# Altium PCB P8_ref.PcbDoc
Units mm, origin at the board's own origin, x right, y up, seen from the top; angles counter-clockwise.
Board outline 39 x 39 mm, 2 copper layers (Top Layer, Bottom Layer); 87 components, 54 nets, 243 pads, 135 vias.
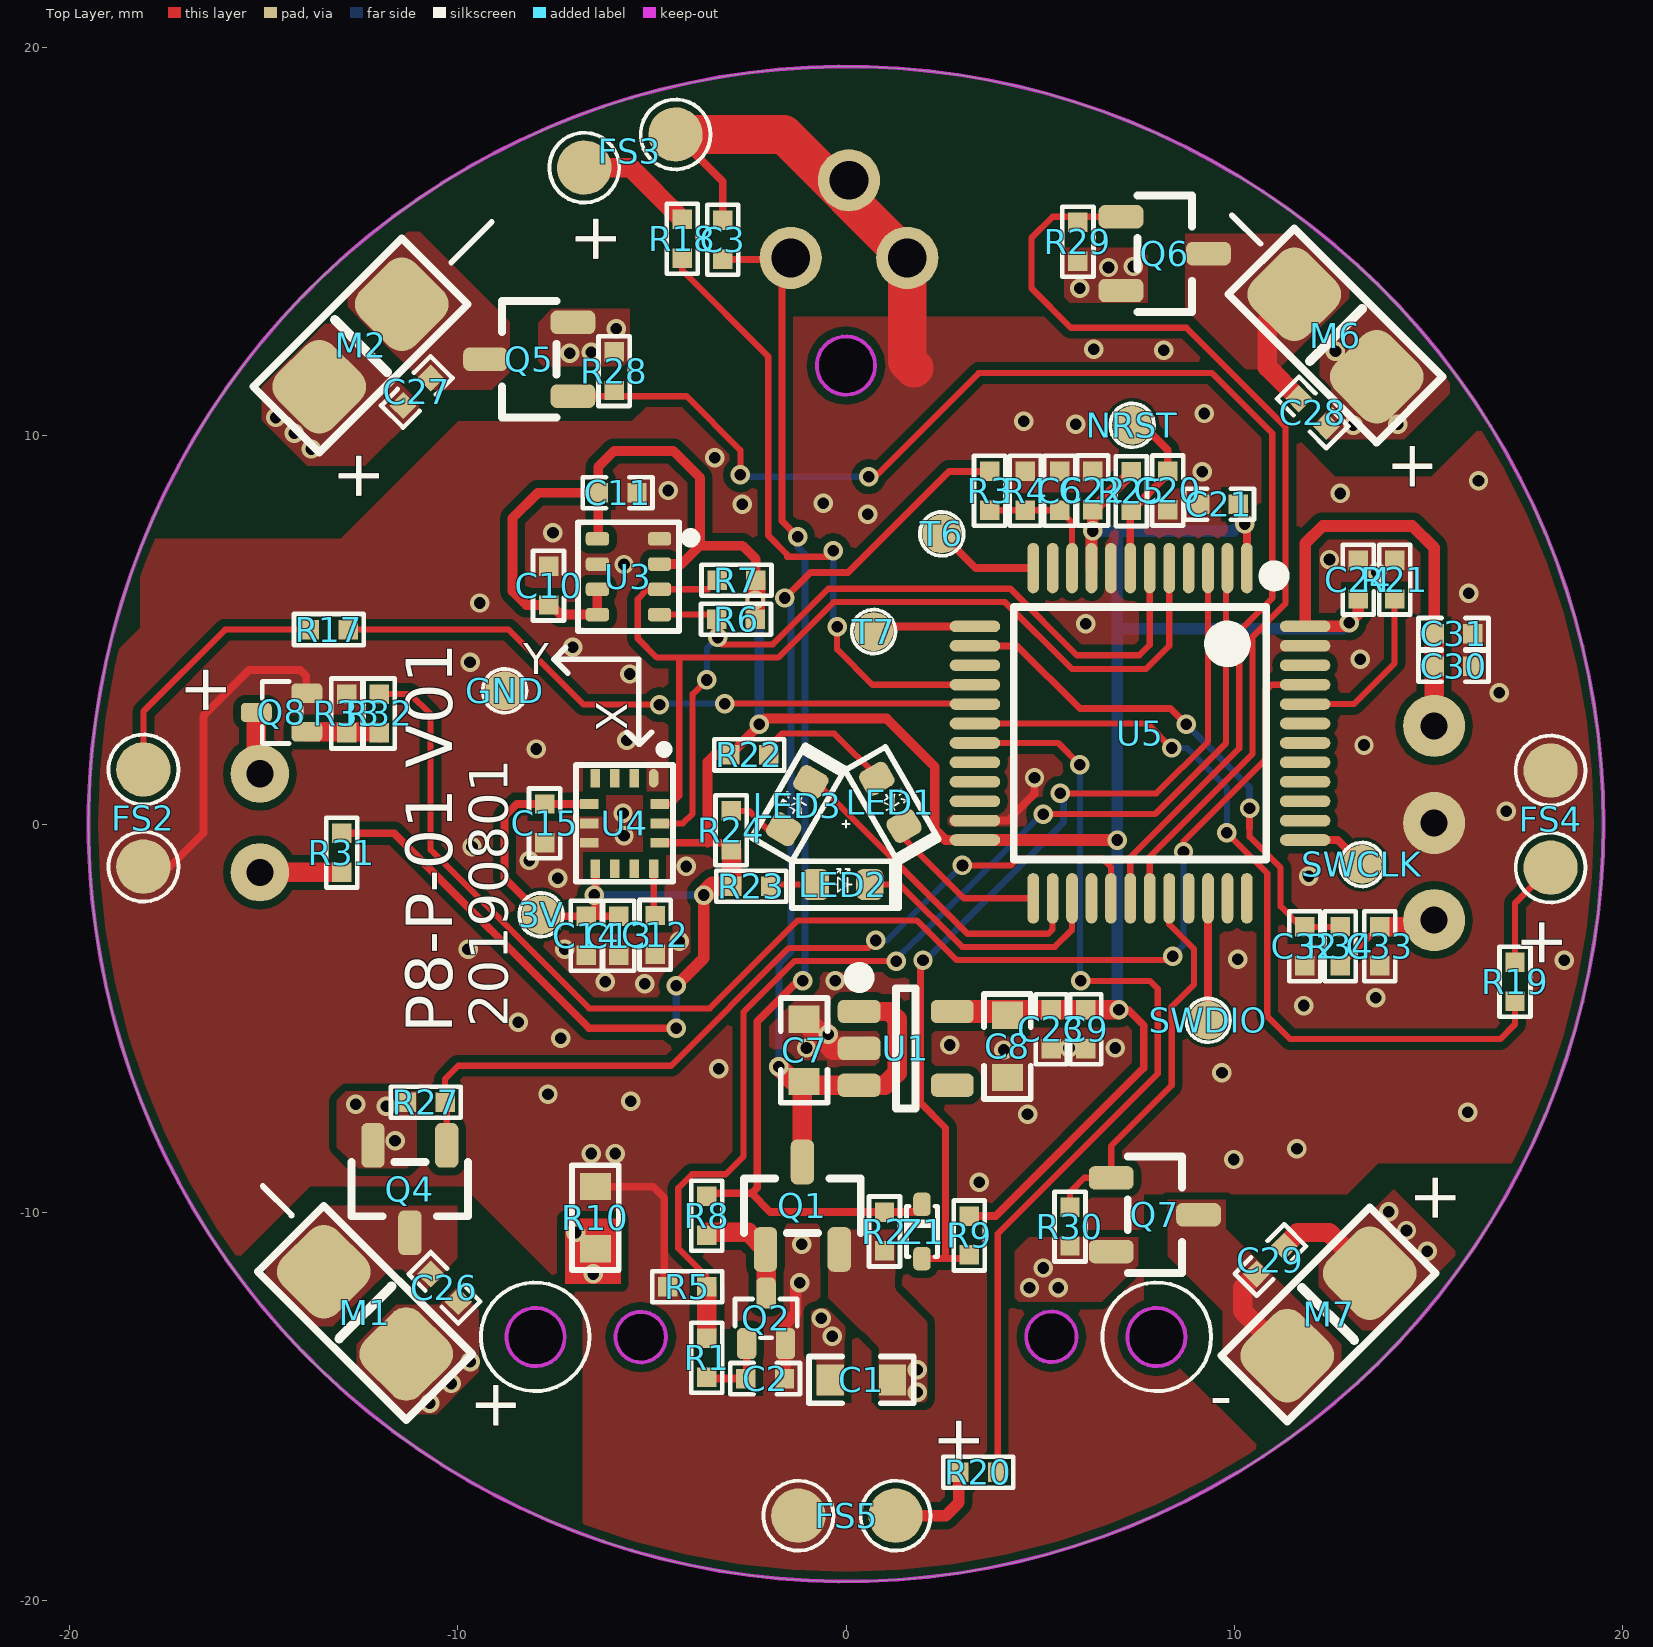
[diagram p0: Top Layer view]
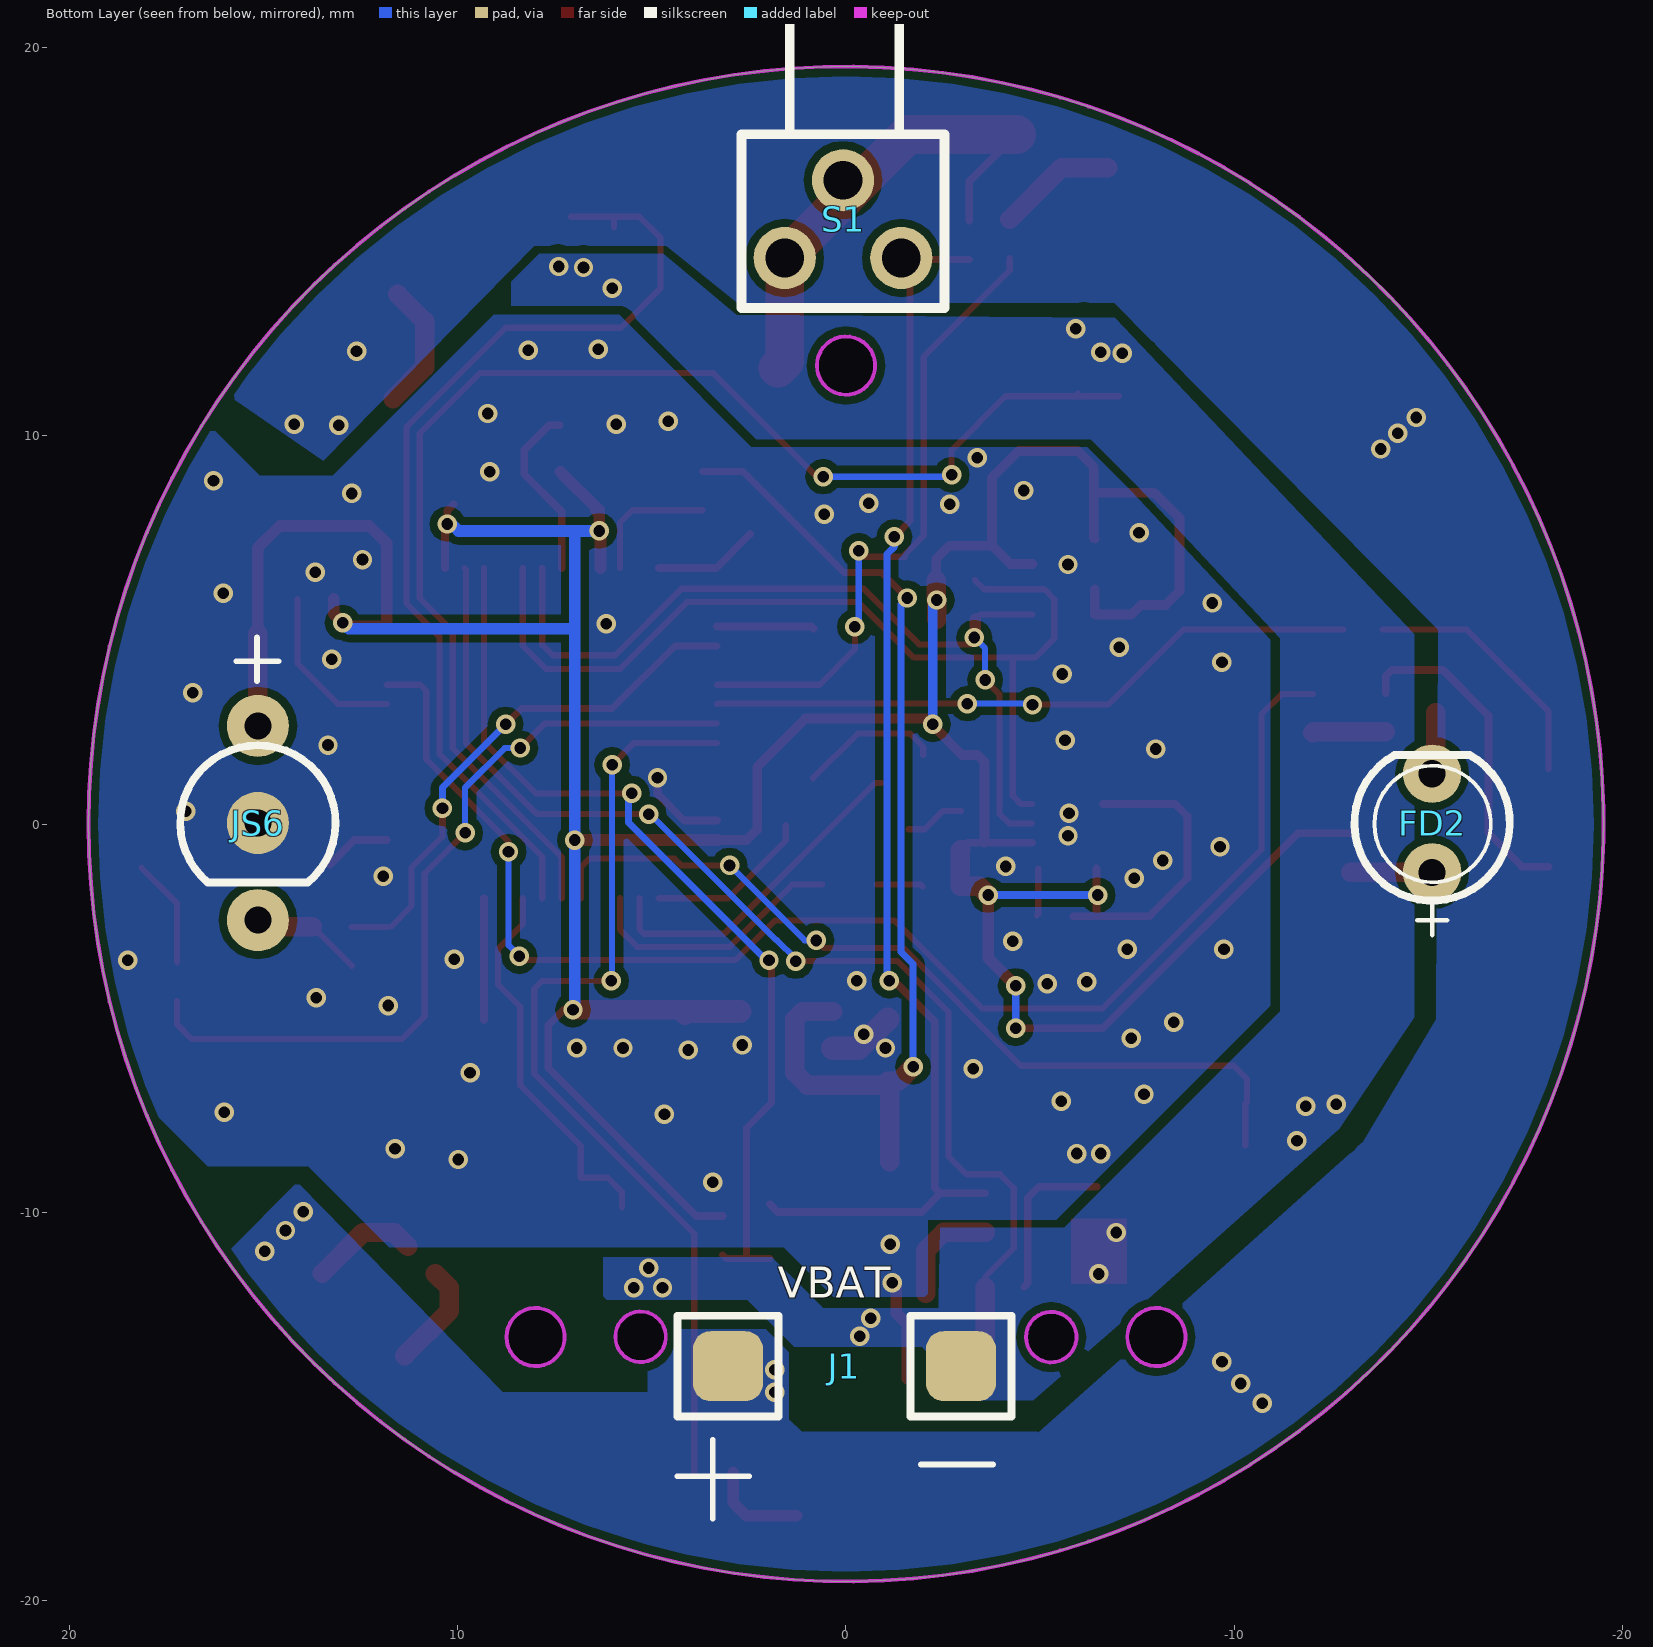
[diagram p1: Bottom Layer view, seen from below]

## Layer stack, top to bottom
Top Layer: signal copper 0.0356
Dielectric: dielectric 0.32, FR-4, Dk 4.8
Bottom Layer: signal copper 0.0356

## Board outline
-19.5,0 ccw(c0,0) 0,-19.5 ccw(c0,0) 19.5,0 ccw(c0,0) 0,19.5 ccw(c0,0)
cut-out: -0.75,11.8 ccw(c0,11.8) 0,11.05 ccw(c0,11.8) 0.75,11.8 ccw(c0,11.8) 0,12.55 ccw(c0,11.8)
cut-out: -5.933,-13.208 ccw(c-5.283,-13.208) -5.283,-13.858 ccw(c-5.283,-13.208) -4.633,-13.208 ccw(c-5.283,-13.208) -5.283,-12.558 ccw(c-5.283,-13.208)
cut-out: 4.638,-13.2 ccw(c5.288,-13.2) 5.288,-13.85 ccw(c5.288,-13.2) 5.938,-13.2 ccw(c5.288,-13.2) 5.288,-12.55 ccw(c5.288,-13.2)
cut-out: -8.741,-13.207 ccw(c-7.991,-13.207) -7.991,-13.957 ccw(c-7.991,-13.207) -7.241,-13.207 ccw(c-7.991,-13.207) -7.991,-12.457 ccw(c-7.991,-13.207)
cut-out: 7.241,-13.207 ccw(c7.991,-13.207) 7.991,-13.957 ccw(c7.991,-13.207) 8.741,-13.207 ccw(c7.991,-13.207) 7.991,-12.457 ccw(c7.991,-13.207)

## Design rules (kind name [scope] priority, off if disabled: settings)
Clearance Polygon [InPolygon] p1: gap=0.2
Clearance [All] p2: gap=0.18
HoleSize [All] p1 off: absolutevalues=TRUE maxlimit=2.54 minlimit=0.025 maxpercent=80.000 minpercent=20.000
HoleToHoleClearance [All] p1 off: gap=0.254 allowstackedmicrovias=TRUE
LayerPairs [All] p1 off: enforce=TRUE
MinimumSolderMaskSliver [All] p1 off: minsoldermaskwidth=0.254
NetAntennae [All] p1 off: netantennaetolerance=0
PlaneConnect [All] p1: planeconnectstyle=Direct reliefexpansion=0.508 reliefentries=4 reliefconductorwidth=0.254 reliefairgap=0.254
PolygonConnect [All] p1: connectstyle=Direct reliefconductorwidth=0.254 reliefentries=4 polygonreliefangle="90 Angle" airgapwidth=0.254
RoutingVias [All] p1: holewidth=0.3 width=0.5 viastyle="Through Hole" minholewidth=0.3 minwidth=0.5 maxholewidth=0.711 maxwidth=1.27
SilkToSilkClearance [All] p1 off: silktosilkclearance=0.254
SilkToSolderMaskClearance [IsPad] p1 off: minsilkscreentomaskgap=0.254 clearancetoexposedcopper=TRUE
SolderMaskExpansion [All] p1: expansion=0.102
Width [All] p1: maxlimit=1 minlimit=0.1 preferedwidth=0.16 minimp=50.000000 maximp=50.000000 favimp=50.000000
20 further rules are at their usual default settings.

## Components (designator, comment, footprint, x,y, rotation, side; value= is the part's Value field where it differs from the comment)
3V "Test-Point" Test-Point -7.849,-2.337 r0 top
C1 "10uF" C-0603 0.395,-14.31 r180 top
C2 "100nF" C-0402 -2.083,-14.275 r0 top
C3 "100nF" C-0402 -3.175,15.037 r90 top
C6 "100nF" C-0402 5.5,8.575 r90 top
C7 "10uF" C-0603 -1.079,-5.827 r90 top
C8 "10uF" C-0603 4.154,-5.725 r270 top
C9 "100nF" C-0402 6.172,-5.283 r270 top
C10 "100nF" C-0402 -7.657,6.137 r270 top
C11 "100nF" C-0402 -5.879,8.524 r0 top
C12 "100nF" C-0402 -4.914,-2.855 r90 top
C13 "100nF" C-0402 -5.847,-2.876 r90 top
C14 "2.2uF" C-0402 -6.685,-2.876 r90 top
C15 "10nF" C-0402 -7.759,0.015 r90 top
C20 "100nF" C-0402 8.28,8.585 r270 top
C21 "100nF" C-0402 9.601,8.23 r180 top
C22 "100nF" C-0402 6.35,8.585 r90 top
C23 "100nF" C-0402 5.283,-5.283 r270 top
C24 "100nF" C-0402 13.183,6.291 r90 top
C26 "100nF" C-0402 -10.338,-11.938 r135 top
C27 "100nF" C-0402 -11.049,11.125 r45 top
C28 "100nF" C-0402 12.014,10.592 r135 top
C29 "100nF" C-0402 10.922,-11.227 r225 top
C30 "2.2uF" C-0402 15.638,4.064 r0 top
C31 "100nF" C-0402 15.638,4.902 r0 top
C32 "2.2nF" C-0402 11.811,-3.15 r270 top
C33 "2.2nF" C-0402 13.741,-3.15 r270 top
FD2 "" LED-3 -15.088,0.025 r90 bottom locked
FS2 "LED-RS" PAD-2 -18.085,0.152 r270 top locked
FS3 "LED-RS" PAD-2 -5.563,17.323 r20 top
FS4 "LED-RS" PAD-2 18.136,0.127 r90 top
FS5 "LED-RS" PAD-2 0.025,-17.805 r180 top
GND "Test-Point" Test-Point -8.788,3.429 r90 top
J1 "" Motor-6.0 0.039,-13.955 r180 bottom
JS6 "LF0038G" LED-CA 15.138,0.025 r270 bottom locked
LED1 "LED-RS" LED-0603 1.143,0.559 r300 top
LED2 "LED-RS" LED-0603 -0.088,-1.56 r0 top
LED3 "LED-RS" LED-0603 -1.256,0.472 r60 top
M1 "Motor" Motor-3.0 -12.382,-12.583 r135 top
M2 "Motor" Motor-3.0 -12.497,12.319 r45 top locked
M6 "Motor" Motor-3.0 12.598,12.573 r135 top
M7 "Motor" Motor-3.0 12.421,-12.624 r225 top locked
NRST "Test-Point" Test-Point 7.366,10.262 r90 top
Q1 "CJ2305" SOT-23 -1.123,-9.826 r0 top
Q2 "MMBT2222AT" SOT-523 -2.057,-12.725 r0 top
Q4 "CJ2312" SOT-23C -11.227,-9.398 r180 top
Q5 "CJ2312" SOT-23C -8.153,11.963 r90 top
Q6 "CJ2312" SOT-23C 8.204,14.681 r270 top
Q7 "CJ2312" SOT-23C 7.95,-10.058 r270 top
Q8 "MMBT2222AT" SOT-523 -14.529,2.87 r90 top
R1 "1K" R-0402 -3.587,-13.737 r90 top
R2 "10K" R-0402 0.991,-10.49 r270 top
R3 "100k" R-0402 3.697,8.575 r90 top
R4 "100k" R-0402 4.611,8.575 r270 top
R5 "4.7K" R-0402 -4.089,-11.913 r180 top
R6 "4.7K" R-0402 -2.831,5.273 r0 top
R7 "4.7K" R-0402 -2.819,6.274 r0 top
R8 "100K" R-0402 -3.581,-10.084 r270 top
R9 "4.7K" R-0402 3.175,-10.592 r270 top
R10 "0R" R-0603 -6.452,-10.135 r270 top
R17 "180R" R-0402 -13.31,5.004 r0 top
R18 "180R" R-0402 -4.216,15.062 r270 top
R19 "180R" R-0402 17.221,-4.064 r270 top
R20 "180R" R-0402 3.404,-16.688 r0 top
R21 "10k" R-0402 14.123,6.291 r90 top
R22 "100R" R-0402 -2.489,1.778 r180 top
R23 "200R" R-0402 -2.438,-1.6 r180 top
R24 "150R" R-0402 -2.958,-0.163 r270 top
R25 "100k" R-0402 7.348,8.57 r270 top
R27 "10K" R-0402 -10.82,-7.163 r0 top
R28 "10K" R-0402 -5.969,11.659 r270 top
R29 "10K" R-0402 5.969,14.986 r90 top
R30 "10K" R-0402 5.766,-10.363 r90 top
R31 "22R" R-0402 -12.979,-0.737 r90 top
R32 "2.2K" R-0402 -12.014,2.845 r270 top
R33 "10K" R-0402 -12.852,2.845 r270 top
R34 "100R" R-0402 12.725,-3.15 r90 top
S1 "" K3*2 0.076,15.57 r180 bottom
SWCLK "Test-Point" Test-Point 13.284,-1.041 r90 top
SWDIO "Test-Point" Test-Point 9.322,-5.055 r90 top
T6 "Test-Point" Test-Point 2.464,7.468 r0 top
T7 "Test-Point" Test-Point 0.711,4.953 r0 top
U1 "LY2506C30M" SOT23-5 1.538,-5.776 r0 top
U3 "DPS310" LGA-8 -5.6,6.365 r0 top
U4 "ICM20600" LLGA14 -5.701,0.015 r270 top
U5 "GD32E230C6T6" LQFP-48 7.569,2.337 r270 top locked
Z1 "1N5819" SOD-523 1.956,-10.49 r90 top

## Footprints (in the part's own frame and the unit in brackets; to place one, negate y for a bottom-side part, rotate by r counter-clockwise, add the part's x,y. Pads: shape width x height; smd on the part's side, far side on the other; paste and mask are expansions set on the pad)
C-0402 [mm]
  rect 0.5x0.5 smd mask+0.05: 1(-0.5,0) 2(0.5,0)
  silkscreen extent -0.9,-0.4 0.9,0.4, body extent -0.5,-0.25 0.5,0.25, height 0.5
C-0603 [mm]
  rect 0.7x0.8 smd mask+0.05: 1(-0.8,0) 2(0.8,0)
  silkscreen extent -1.35,-0.6 1.35,0.6, body extent -0.8,-0.4 0.8,0.4, height 0.7
K3*2 [mm]
  round 1.6 hole 1 mask+0.05: 0(0,1) 1(-1.5,-1) 2(1.5,-1)
  silkscreen extent -2.62,-2.29 2.62,6.7
LED-3 [mm]
  round 1.5 hole 0.7 mask+0.05: 1(-1.27,0) 2(1.27,0)
  silkscreen extent -2.88,-2 1.75,2, body extent -2.1,-2.1 2.1,2.1, height 13
LED-0603 [mm]
  rrect50% 0.7x0.8 smd mask+0.05: 1(-0.7,0) 2(0.7,0)
  silkscreen extent -1.3,-0.6 1.45,0.6, body extent -0.8,-0.4 0.8,0.4, height 0.4
LED-CA [mm]
  round 1.6 hole 0.7 mask+0.05: 1(2.5,0) 2(0,0) 3(-2.5,0)
  silkscreen extent -2,-2 1.53,2, body extent -3,-2.99 3,2.99, height 15.5
LGA-8 [mm] "FOR 2SMPB-02 AND BMP280"
  rrect50% 0.6x0.35 smd mask+0.05: 1(0.8,0.975) 2(0.8,0.325) 3(0.8,-0.325) 4(0.8,-0.975) 5(-0.8,-0.975) 6(-0.8,-0.325) 7(-0.8,0.325) 8(-0.8,0.975)
  silkscreen extent -1.3,-1.4 1.7,1.4, body extent -1,-1.27 1,1.28, height 0.95
LLGA14 [mm]
  oval 0.475x0.25 smd: 1(-1.162,0.75)
  rect 0.475x0.25 smd: 2(-1.162,0.25) 3(-1.162,-0.25) 4(-1.162,-0.75) 8(1.163,-0.75) 9(1.163,-0.25) 10(1.163,0.25) 11(1.163,0.75)
  rect 0.25x0.475 smd: 5(-0.5,-0.913) 6(0,-0.913) 7(0.5,-0.913) 12(0.5,0.913) 13(0,0.913) 14(-0.5,0.913)
  silkscreen extent -2,-1.25 1.5,1.25, body extent -1.5,-1.29 1.5,1.29, height 0.9
LQFP-48 [mm] "TSQFP, 48-Leads, Body 9.1x9.1mm (max), Pitch 0.50mm, IPC Medium Density"
  oval 1.3x0.3 smd mask+0.05: 1(-4.25,2.75) 2(-4.25,2.25) 3(-4.25,1.75) 4(-4.25,1.25) 5(-4.25,0.75) 6(-4.25,0.25) 7(-4.25,-0.25) 8(-4.25,-0.75) 9(-4.25,-1.25) 10(-4.25,-1.75) 11(-4.25,-2.25) 12(-4.25,-2.75) 25(4.25,-2.75) 26(4.25,-2.25) 27(4.25,-1.75) 28(4.25,-1.25) 29(4.25,-0.75) 30(4.25,-0.25) 31(4.25,0.25) 32(4.25,0.75) 33(4.25,1.25) 34(4.25,1.75) 35(4.25,2.25) 36(4.25,2.75)
  oval 0.3x1.3 smd mask+0.05: 13(-2.75,-4.25) 14(-2.25,-4.25) 15(-1.75,-4.25) 16(-1.25,-4.25) 17(-0.75,-4.25) 18(-0.25,-4.25) 19(0.25,-4.25) 20(0.75,-4.25) 21(1.25,-4.25) 22(1.75,-4.25) 23(2.25,-4.25) 24(2.75,-4.25) 37(2.75,4.25) 38(2.25,4.25) 39(1.75,4.25) 40(1.25,4.25) 41(0.75,4.25) 42(0.25,4.25) 43(-0.25,4.25) 44(-0.75,4.25) 45(-1.25,4.25) 46(-1.75,4.25) 47(-2.25,4.25) 48(-2.75,4.25)
  silkscreen extent -4.25,-3.25 3.25,3.65, body extent -4.5,-4.49 4.5,4.51, height 1.56
Motor-3.0 [mm]
  rrect50% 2x2 smd mask+0.05: 1(-1.5,0) 2(1.5,0)
  silkscreen extent -2.7,-1.2 2.7,1.2, body extent -2.2,-0.7 2.2,0.7, height 0.5
Motor-6.0 [mm]
  rrect50% 1.8x1.8 smd mask+0.05: 1(-3,0) 2(3,0)
  silkscreen extent -4.3,-1.3 4.3,1.3, body extent -3.7,-0.7 3.7,0.7, height 0.5
PAD-2 [mm]
  round 1.4 smd mask+0.05: 1(-1.25,0) 2(1.25,0)
  silkscreen extent -2.15,-0.9 2.15,0.9, body extent -1.76,-0.51 1.74,0.49, height 0.5
R-0402 [mm]
  rect 0.5x0.5 smd mask+0.05: 1(-0.5,0) 2(0.5,0)
  silkscreen extent -0.9,-0.4 0.9,0.4, body extent -0.5,-0.25 0.5,0.25, height 0.5
R-0603 [mm]
  rect 0.7x0.8 smd mask+0.05: 1(-0.8,0) 2(0.8,0)
  silkscreen extent -1.35,-0.6 1.35,0.6, body extent -0.8,-0.4 0.8,0.4, height 0.7
SOD-523 [mm]
  rrect50% 0.6x0.45 smd mask+0.05: 1(-0.7,0) 2(0.7,0)
  silkscreen extent -0.65,-0.4 0.65,0.4, body extent -0.9,-0.4 0.9,0.4, height 0.65
SOT23-5 [mm]
  rrect50% 1.1x0.6 smd mask+0.05: 1(-1.2,0.95) 2(-1.2,0) 3(-1.2,-0.95) 4(1.2,-0.95) 5(1.2,0.95)
  silkscreen extent -1.4,-1.55 0.25,2.02, body extent -1.5,-1.55 1.5,1.55, height 1.45
SOT-23 [mm]
  rrect50% 0.6x1.15 smd mask+0.05: 1(-0.95,-1.125) 2(0.95,-1.125) 3(0,1.125)
  silkscreen extent -1.5,-0.7 1.5,0.7, body extent -1.5,-1.4 1.5,1.4, height 1
SOT-23C [mm]
  rrect50% 0.6x1.15 smd mask+0.05: 1(-0.95,-1.125) 2(0.95,-1.125) 3(0,1.125)
  silkscreen extent -1.5,-0.7 1.5,0.7, body extent -1.5,-1.4 1.5,1.4, height 1.1
SOT-523 [mm] "SOT23, 3-Leads, Body 1.60x1.60mm, Pitch 0.50mm, IPC Medium Density"
  rrect50% 0.5x0.8 smd mask+0.05: 1(-0.5,-0.65) 2(0.5,-0.65) 3(0,0.65)
  silkscreen extent -0.8,-0.5 0.8,0.5, body extent -0.75,-0.45 0.75,0.45, height 0.9
Test-Point [mm]
  round 1 smd paste-2 mask+0.05: 0(0,0)
  silkscreen extent -0.56,-0.56 0.56,0.56

## Part data
C1 C2 C3 C6 C7 C8 C9 C10 C11 C12 C13 C14 C15 C20 C21 C22 C23 C24 C26 C27 C28 C29 C30 C31 C32 C33: library part CAP, "Capacitor"
FD2: library part LED3, "Typical BLUE SiC LED"
FS2 FS3 FS4 FS5 LED1 LED2 LED3: library part LED-SM
J1: library part CON2
M1 M2 M6 M7: "Motor, General Kind"
Q1: library part MOSFET-P, "P-Channel MOSFET"
Q2 Q8: library part NPN[SOT-23], "EBC"
Q4 Q5 Q6 Q7: library part MOSFET-N, "N-Channel MOSFET"
R1 R2 R8 R9 R10: library part Res2, "Resistor"
R3 R4 R5 R6 R7 R17 R18 R19 R20 R21 R22 R23 R24 R25 R27 R28 R29 R30 R31 R32 R33 R34: library part Res, "Resistor"
S1: library part SW2, "Switch"
U1: library part RT9167A-33PB
U3: library part 2SMPB-02, "Digital pressure sensor “ BMP280”or “2SMPB-02”"
Z1: library part "D Schottky", "Schottky Diode"

## Via types
v1: diameter 0.5, hole 0.3, Top Layer to Bottom Layer, tented both sides, 135 vias

## Nets (pads, with @x,y where several pads share a name; then routed paths per layer and width w, separated by ;. In a path a pad name is that pad's centre, name@x,y a point inside that pad or via, vN(x,y) a via of type N, cw(c..) or ccw(c..) an arc to the next point about the centre after c; other vN are vias at no path point)
2.4G_CSN: U5.38
2.4G_MISO: U5.40
2.4G_MOSI: U5.41
2.4G_SCK: U5.39
ADC_BAT: C6.1 R3.1 R4.2 U5.10 | length 3.4
  Top Layer w0.16: R3.1 C6.1 5.819,7.756 U5.10
GND: C2.2 C3.2 C6.2 C7.2 C8.2 C9.2 C10.1 C11.2 C12.1 C13.1 C14.1 C15.1 C20.2 C21.2 C22.2 C23.2 C24.2 C30.2 C31.2 C32.2 C33.2 FS2.2 FS3.2 FS4.2 FS5.2 GND.0 JS6.2 Q2.2 Q8.2 R4.1 R5.2 R10.1 R21.2 R33.1 S1.0 S1.1 U1.2 U3.1 U3.7 U4.1 U4.6 U4.7 U5.8 U5.23 U5.47 | length 32.3
  Top Layer w0.2: FS2.2 -17.404,-1.098 -16.535,-0.229 -16.535,2.794 -15.367,3.962 -14.046,3.962 -13.894,3.81 Q8.2@-13.894,3.37 ; R10.1 -4.966,-9.335 -4.678,-9.622 -4.678,-11.824 R5.2 ; FS3.2 -3.175,16.538 C3.2 ; U5.23 4.163,0.087 4.851,0.775 v1(4.851,1.194)
  Top Layer w0.3: C2.2 -1.583,-12.886 -1.295,-12.598 -1.295,-11.913 v1(-1.194,-11.811)
  Top Layer w0.6: C7.2 -0.329,-5.776 U1.2
  Top Layer w1: FS3.2 -1.604,17.75 S1.1 1.576,11.911 1.753,11.735
  other v1: -1.143,-10.82 3.429,-9.22 9.982,-8.636 -6.553,-8.484 -5.944,-8.484 11.608,-8.357 4.674,-7.468 16.002,-7.417 -5.537,-7.137 -7.671,-6.96 9.677,-6.401 -3.277,-6.299 4.064,-5.817 -1.016,-5.766 5.74,-5.766 6.934,-5.766 2.667,-5.69 -7.341,-5.512 -0.457,-5.41 -8.433,-5.105 11.786,-4.674 13.64,-4.47 -5.182,-4.115 -6.198,-4.064 -0.279,-4.039 18.491,-3.505 10.084,-3.48 -9.728,-3.226 -7.239,-3.226 -4.293,-3.023 -7.417,-1.397 11.913,-1.346 -4.115,-1.092 -8.153,-0.94 -9.627,-0.584 -5.715,-0.305 -5.74,0.279 16.993,0.33 -7.976,1.93 13.335,2.032 -5.639,2.159 16.815,3.378 -5.563,3.861 -9.677,4.166 13.233,4.242 -7.036,4.547 6.172,5.156 -9.423,5.69 16.027,5.944 13.665,6.477 -5.715,6.68 12.446,6.807 -7.544,7.493 0.559,7.976 -2.667,8.23 -0.584,8.255 12.725,8.509 -4.572,8.585 16.281,8.839 9.169,9.068 -3.378,9.423 5.918,10.287 4.572,10.363 9.22,10.566 8.179,12.192 6.375,12.217
HW_LH: R20.2 U5.19 | length 24.7
  Top Layer w0.16: U5.19 5.457,2.087 v1(6.02,1.524) ; R20.2 3.904,-10.55 8.026,-6.427 8.026,-4.242 7.823,-4.039 v1(6.045,-4.039)
  Bottom Layer w0.16: v1@6.02,-4.039 6.022,-4.037 6.022,1.522 v1(6.02,1.524)
HW_LT: R19.2 U5.18 | length 21
  Top Layer w0.16: U5.18 7.751,2.587 v1(8.382,1.956) ; v1(9.804,-0.229) 10.846,-1.27 10.846,-4.953 11.43,-5.537 16.84,-5.537 17.221,-5.156 R19.2
  Bottom Layer w0.16: v1(8.382,1.956) 8.788,1.956 9.804,0.94 v1(9.804,-0.229) v1@9.703,-0.229
HW_RH: R18.2 U5.16 | length 16.6
  Top Layer w0.16: R18.2 -4.216,14.249 -2.001,12.034 -2.001,7.427 -1.522,6.948 -1.522,6.881 -0.485,6.881 v1(-0.33,7.036) ; v1(-0.229,5.08) -0.229,4.496 0.68,3.587 U5.16
  Bottom Layer w0.16: v1(-0.33,7.036) -0.33,5.182 v1(-0.229,5.08)
HW_RT: R17.2 U5.17 | length 16.9
  Top Layer w0.16: R17.2 -8.687,5.004 -6.756,3.073 v1(-4.801,3.073) ; v1(-3.124,3.099) 3.307,3.099 U5.17
  Bottom Layer w0.16: v1(-4.801,3.073) -4.775,3.099 v1(-3.124,3.099)
HWF_2: R32.1 U5.45 | length 36.1
  Top Layer w0.16: R32.1 -11.219,3.345 -10.693,2.819 -10.693,-0.668 -6.614,-4.748 -3.51,-4.748 -1.249,-2.487 1.83,-2.487 2.846,-3.503 8.308,-3.503 v1(8.407,-3.404) ; v1(8.687,-0.711) 8.687,-0.455 10.805,1.663 10.805,3.429 10.963,3.587 U5.45
  Bottom Layer w0.16: v1(8.407,-3.404) 8.687,-3.124 v1(8.687,-0.711)
HWJ_2: C32.1 R34.2 U5.14 | length 13.6
  Top Layer w0.16: 10.389,-0.115 10.389,-0.33 11.186,-1.127 11.186,-2.118 C32.1@11.709,-2.642 ; C32.1 R34.2
  Top Layer w0.18: U5.14 4.405,4.587 6.02,2.972 8.357,2.972 v1(8.763,2.565) ; 10.389,-0.115 v1(10.389,0.406)
  Bottom Layer w0.18: v1(8.763,2.565) 10.389,0.94 v1(10.389,0.406)
KEY1: C3.1 R2.1 R8.1 S1.2 Z1.2 | length 32.6
  Top Layer w0.18: C3.1 S1.2@-1.457,14.537 ; S1.2 S1.2@-1.457,14.537 ; v1(-1.245,7.391) -1.651,7.798 -1.651,14.343 S1.2@-1.457,14.537
  Top Layer w0.2: R8.1@-3.581,-9.508 -2.43,-9.508 ; v1(-1.118,-4.039) -1.236,-4.039 -2.282,-5.084 -2.282,-9.359 -2.43,-9.508 ; Z1.2 1.756,-9.99 R2.1 -1.948,-9.99 -2.43,-9.508
  Bottom Layer w0.18: v1(-1.245,7.391) -1.245,7.137 -1.055,6.948 -1.055,-3.976 v1(-1.118,-4.039)
LED_B: LED1.2 U5.25 | length 4.3
  Top Layer w0.16: LED1.2@1.55,-0.032 1.55,-0.433 3.031,-1.913 U5.25
LED_G: LED3.2 U5.26 | length 8.7
  Top Layer w0.16: LED3.2@-0.906,1.059 -0.754,1.059 3.128,-2.823 5.203,-2.823 5.319,-2.707 U5.26
LED_R: LED2.2 U5.27 | length 6.9
  Top Layer w0.16: LED2.2 1.383,-1.56 2.987,-3.163 5.371,-3.163 5.819,-2.715 U5.27
M1: Q4.1 R27.2 U5.29 | length 22.1
  Top Layer w0.16: Q4.1 -10.277,-7.206 R27.2 -10.32,-6.561 -9.982,-6.223 -4.504,-6.223 -1.47,-3.189 0.571,-3.189 v1(0.762,-2.997) ; v1(2.997,-1.067) 4.242,-1.067 4.42,-0.889 6.604,-0.889 6.819,-1.104 U5.29
  Bottom Layer w0.16: v1(0.762,-2.997) 1.067,-2.997 v1(2.997,-1.067)
M2: Q5.1 R28.2 U5.30 | length 34.5
  Top Layer w0.16: Q5.1 R28.2@-5.908,11.013 ; R28.2@-5.969,11.074 R28.2@-5.908,11.013 ; v1(-2.718,8.992) -2.718,9.627 -4.105,11.013 R28.2@-5.908,11.013 ; v1(0.584,8.941) 0.752,8.941 3.419,11.608 9.423,11.608 10.973,10.058 10.973,5.815 10.125,4.967 10.125,1.944 7.319,-0.861 U5.30
  Bottom Layer w0.16: v1(-2.718,8.992) -2.667,8.941 v1(0.584,8.941)
M3: Q6.1 R29.2 U5.31 | length 25.7
  Top Layer w0.16: R29.2@5.969,15.359 R29.2@5.969,15.606 ; Q6.1 5.319,15.631 4.775,15.088 4.775,13.792 5.791,12.776 8.763,12.776 11.313,10.226 11.313,5.674 10.465,4.826 10.465,1.803 7.819,-0.842 U5.31
M4: Q7.1 R30.2 U5.32 | length 9.9
  Top Layer w0.16: R30.2 5.766,-9.474 6.132,-9.108 Q7.1 6.825,-8.288 8.384,-6.729 8.384,-4.699 8.959,-4.124 8.959,-3.219 8.319,-2.579 U5.32
MT1: C26.2 M1.2 Q4.3
MT2: C27.2 M2.2 Q5.3
MT3: C28.2 M6.2 Q6.3 | length 3.3
  Top Layer w0.5: M6.2 10.846,12.942 10.846,11.76 C28.2
MT4: C29.2 M7.2 Q7.3 | length 2.7
  Top Layer w0.5: C29.2 10.211,-11.938 10.211,-12.535 M7.2
NetC2_1: C2.1 Q2.1 R1.1 | length 1.9
  Top Layer w0.2: R1.1 -3.549,-14.275 C2.1 -2.557,-14.249 Q2.1
NetC12_2: C12.2 U4.11 | length 1.2
  Top Layer w0.16: U4.11 -4.951,-2.318 C12.2
NetC33_1: C33.1 JS6.1 R34.1 | length 2.9
  Top Layer w0.16: R34.1 13.725,-2.65 C33.1
  Top Layer w0.5: C33.1 14.963,-2.65 JS6.1
NetFD2_1: FD2.1 R31.1 | length 2.1
  Top Layer w0.5: FD2.1 R31.1@-12.987,-1.245
NetFD2_2: FD2.2 Q8.3 | length 1.6
  Top Layer w0.5: Q8.3 -15.179,1.387 FD2.2
NetFS2_1: FS2.1 R17.1 | length 6.6
  Top Layer w0.16: FS2.1 -18.085,2.896 -15.977,5.004 R17.1
NetFS3_1: FS3.1 R18.1 | length 3.1
  Top Layer w0.5: FS3.1 -5.549,16.895 R18.1
NetFS4_1: FS4.1 R19.1 | length 2.8
  Top Layer w0.16: R19.1 17.221,-2.037 FS4.1
NetFS5_1: FS5.1 R20.1 | length 2.5
  Top Layer w0.3: FS5.1 2.565,-17.805 2.904,-17.467 R20.1
NetLED1_1: LED1.1 R22.1 | length 3.7
  Top Layer w0.16: R22.1 -1.989,1.991 -1.651,2.329 -0.298,2.329 LED1.1@0.85,1.18
NetLED2_1: LED2.1 R23.1 | length 1.2
  Top Layer w0.16: R23.1@-1.976,-1.61 -1.925,-1.56 LED2.1
NetLED3_1: LED3.1 R24.1 | length 1.5
  Top Layer w0.16: R24.1 -2.496,0.337 -2.025,-0.134 LED3.1
NetQ1_1: Q1.1 Q2.3 R8.2 | length 2.8
  Top Layer w0.5: R8.2@-3.581,-10.508 -2.516,-10.508 Q1.1 ; Q2.3 Q1.1@-2.057,-10.966
NetQ8_1: Q8.1 R32.2 R33.2 | length 1.9
  Top Layer w0.5: Q8.1 -12.04,2.37 R32.2
NetR21_1: R21.1 U5.44 | length 4.4
  Top Layer w0.16: U5.44 13.069,3.087 14.123,4.14 R21.1
NRST: C20.1 NRST.0 R25.2 U5.7 | length 4.6
  Top Layer w0.2: U5.7 7.319,8.042 R25.2 8.28,9.003 C20.1 8.28,9.626 7.645,10.262 NRST.0
PGND: C1.2 J1.2 Q4.2 Q5.2 Q6.2 Q7.2 R10.2 R27.1 R28.1 R29.1 R30.1
  other v1: -0.356,-13.183 -0.635,-12.725 4.724,-11.938 5.461,-11.938 -6.502,-11.582 5.08,-11.43 -6.96,-10.516 -11.608,-8.153 -11.836,-7.264 -12.624,-7.214 -7.112,12.116 -6.553,12.141 -5.918,12.751 6.02,13.792 6.756,14.326 7.391,14.351
"POWER ON HOLD": R1.2 R5.1 U5.2 | length 29.7
  Top Layer w0.16: R5.1 -3.589,-11.651 -4.318,-10.922 -4.318,-9.373 -3.962,-9.017 -3.099,-9.017 -2.642,-8.56 -2.642,-4.841 -1.329,-3.529 1.293,-3.529 v1(1.295,-3.531) ; v1(5.08,0.254) 7.954,0.254 9.785,2.085 9.785,6.552 U5.2
  Top Layer w0.5: R1.2@-3.581,-13.232 R5.1@-3.581,-11.921
  Bottom Layer w0.16: v1(1.295,-3.531) 1.295,-3.471 1.778,-2.988 1.797,-2.988 5.039,0.254 v1(5.08,0.254)
PWR_ON_OFF_DECT: R9.2 U5.3 Z1.1 | length 23.9
  Top Layer w0.16: v1(5.512,0.787) 7.986,0.787 9.319,2.121 U5.3
  Top Layer w0.18: Z1.1 2.565,-11.19 ; v1(1.982,-3.505) 1.918,-3.569 1.918,-7.176 2.565,-7.823 2.565,-11.19 ; R9.2 3.077,-11.19 2.565,-11.19
  Bottom Layer w0.18: v1(1.982,-3.505) 2.056,-3.505 5.6,0.039 5.6,0.699 v1(5.512,0.787)
SCL0: R6.1 U3.4 U4.13 U5.6 | length 22.4
  Top Layer w0.16: U3.4 -3.448,5.39 R6.1 ; U4.13 -4.201,0.015 -3.951,0.266 -3.951,3.339 v1(-3.581,3.708) ; v1@-3.331,4.753 -3.2,4.623 -1.888,4.623 -0.458,6.053 4.234,6.053 5.944,4.343 7.553,4.343 7.819,4.61 U5.6
  Top Layer w0.3: v1@-3.331,4.753 R6.1
  Bottom Layer w0.16: v1(-3.581,3.708) -3.581,4.521 v1(-3.302,4.801)
SDA0: R7.1 U3.3 U4.14 U5.5 | length 24.9
  Top Layer w0.16: U4.14 -4.498,0.515 -4.291,0.723 -4.291,4.23 -4.343,4.283 ; R7.1 -3.553,6.04 U3.3 -5.11,6.04 -5.36,5.791 -5.36,4.775 -4.867,4.283 -4.343,4.283 ; U5.5 8.319,4.585 7.722,3.988 5.818,3.988 4.093,5.713 -0.317,5.713 -1.747,4.283 -4.343,4.283
SWCLK: SWCLK.0 U5.37 | length 1.7
  Top Layer w0.2: U5.37 12.656,-0.413 SWCLK.0
SWDIO: SWDIO.0 U5.34 | length 3.1
  Top Layer w0.2: U5.34 9.319,-5.052 SWDIO.0
UART1_RX: T7.0 U5.13 | length 2.5
  Top Layer w0.2: T7.0@0.838,5.029 0.896,5.087 U5.13
UART1_TX: T6.0 U5.12 | length 2.7
  Top Layer w0.2: T6.0 3.345,6.587 U5.12
VBAT: C1.1 C26.1 C27.1 C28.1 C29.1 J1.1 M1.1 M2.1 M6.1 M7.1 Q1.2 R2.2 | length 2.8
  Top Layer w0.5: C29.1 11.633,-10.516 12.434,-10.516 M7.1
  other v1: -10.719,-14.91 1.829,-14.63 -10.16,-14.402 1.829,-14.046 -9.677,-13.843 14.961,-10.998 14.427,-10.465 13.97,-9.982 -13.767,9.652 -14.199,10.058 13.056,10.262 14.199,10.287 -14.681,10.465 12.598,12.167
VCC: C7.1 Q1.3 R3.2 U1.1 U1.3 | length 26.7
  Top Layer w0.18: v1(-1.575,5.817) -0.914,6.477 0.05,6.477 2.648,9.075 R3.2
  Top Layer w0.5: v1(-1.727,-6.248) -1.349,-6.627 C7.1 -0.979,-6.726 U1.3 0.996,-6.726 1.321,-6.401 1.321,-5.029 1.118,-4.826 U1.1 ; Q1.3 C7.1@-1.123,-6.747
  Bottom Layer w0.18: v1(-1.727,-6.248) -1.727,-3.607 -1.415,-3.294 -1.415,5.657 v1(-1.575,5.817)
VDD3V: 3V.0 C8.1 C9.1 C10.2 C11.1 C13.2 C14.2 C15.2 C21.1 C22.1 C23.1 C24.1 C30.1 C31.1 JS6.3 R6.2 R7.2 R9.1 R22.2 R23.2 R24.2 R25.1 R31.2 U1.5 U3.2 U3.5 U3.6 U3.8 U4.5 U4.8 U4.12 U5.1 U5.9 U5.24 U5.48 | length 119.6
  Top Layer w0.2: R31.2 -11.634,-0.237 -6.613,-5.258 v1(-4.369,-5.258) ; U4.5 C15.2 -8.476,0.515 -8.788,0.203 -8.788,-1.397 3V.0 -7.81,-2.376 C14.2 C13.2 ; C14.2@-6.451,-2.351 U4.8 ; U4.12 -3.556,-0.485 -3.136,-0.485 R24.2 ; R9.1 3.853,-10.092 7.666,-6.278 7.666,-5.182 7.268,-4.783 v1(7.028,-4.783) ; C22.1@6.44,8.075 7.348,8.984 R25.1 ; C21.1 10.262,8.069 v1@10.262,7.747 ; v1(10.262,7.722) v1@10.262,7.747 ; U5.1 10.319,7.689 v1@10.262,7.747
  Top Layer w0.25: U3.6 U3.5 -7.346,5.39 -7.592,5.637 C10.2 -8.227,5.637 -8.585,5.994 -8.585,7.874 -7.935,8.524 C11.1 ; U3.8 -6.379,7.361 C11.1 ; U3.2 -4.232,6.69 -3.759,7.163 ; -3.556,-0.485 -3.566,-0.475 -3.566,1.6 -3.388,1.778 R22.2 -2.235,2.532 v1(-2.235,2.565) -2.087,2.714 1.045,2.714 2.286,1.473 2.286,-0.143 2.556,-0.413 U5.24 ; R7.2 -2.319,6.815 -2.667,7.163 -3.759,7.163 ; C11.1 -6.379,9.191 -5.969,9.601 -4.445,9.601 -3.759,8.915 -3.759,7.163
  Top Layer w0.3: v1(-4.369,-4.166) -3.658,-3.454 v1(-3.658,-1.829) ; U5.24 v1(6.978,-0.413) ; U5.9 v1@6.319,7.544 ; C22.1 6.363,8.085 R25.1 ; v1(6.35,7.544) 6.35,7.986 C22.1@6.44,8.075 ; C24.1 13.183,5.41 12.859,5.087 U5.48 11.819,7.222 12.268,7.671 14.58,7.671 15.138,7.112 C31.1
  Top Layer w0.5: v1(-3.658,-1.829) -3.429,-1.6 R23.2 -2.938,-0.682 R24.2 ; R6.2 -2.337,5.279 v1(-2.337,5.766) -2.319,5.783 R7.2 ; C8.1 C8.1@4.171,-4.908 ; C8.1@4.171,-4.826 C8.1@4.171,-4.908 ; v1(7.028,-4.783) C9.1 4.296,-4.783 C8.1@4.171,-4.908 ; JS6.3 C30.1 C31.1
  Top Layer w0.6: U1.5 C8.1@4.171,-4.826
  Bottom Layer w0.2: v1(-6.477,-1.829) v1(-3.658,-1.829) ; v1(-4.369,-5.258) v1(-4.369,-4.166)
  Bottom Layer w0.25: v1(-2.337,5.766) -2.235,5.664 v1(-2.235,2.565)
  Bottom Layer w0.3: v1(6.35,7.544) 6.978,7.544 ; v1(7.028,-4.783) 6.978,-4.734 v1(6.978,-0.413) 6.978,5.029 ; v1(10.262,7.722) 10.153,7.722 9.975,7.544 6.978,7.544 ; v1(12.954,5.182) 12.802,5.029 6.978,5.029 ; 6.978,5.029 6.978,7.544
XN297LCU_CE: U5.42
XN297LCU_IRQ: U5.43
pads on no net: U1.4 U4.2 U4.3 U4.4 U4.9 U4.10 U5.4 U5.11 U5.15 U5.20 U5.21 U5.22 U5.28 U5.33 U5.35 U5.36 U5.46

## Polygon pours and split planes (outlines as drawn)
GND on Bottom Layer "Top layer-No Net" (solid, remove dead copper, pour order 52): -6.223,9.703 -10.922,5.004 -10.922,2.235 -10.922,-4.674 -6.121,-9.474 -5.41,-10.185 -2.413,-10.185 -2.108,-10.185 -2.108,-11.379 -2.108,-12.09 -2.083,-12.116 -2.032,-12.167 -0.66,-12.167 0.33,-12.167 1.092,-11.405 1.6,-10.897 3.658,-10.897 11.76,-10.897 13.691,-8.966 13.843,-8.814 14.605,-8.814 16.434,-8.814 17.247,-8.001 19.507,-5.74 19.507,5.74 19.507,7.595 16.612,10.49 15.088,8.966 13.487,8.966 13.208,8.966 9.068,13.106 5.842,13.106 5.004,12.268 2.438,9.703 -6.248,9.703
PGND on Bottom Layer "Top layer-No Net" (solid, remove dead copper, pour order 49): -2.337,-14.834 -4.826,-14.834 -12.7,-7.849 -14.63,-4.978 -14.63,4.88 -6.92,13.026 2.819,13.106 4.699,14.681 7.899,14.681 9.881,12.675 8.611,13.97 8.611,13.335 5.74,13.335 2.311,9.906 -6.299,9.906 -7.493,8.712 -11.176,4.775 -11.176,-4.826 -6.121,-9.881 -5.613,-10.389 -2.432,-10.389
VBAT on Bottom Layer "Top layer-No Net" (solid, remove dead copper, pour order 47): 5.105,-18.551 8.484,-17.577 13.106,-14.529 16.018,-11.121 14.122,-9.22 8.839,-14.63 4.953,-14.63 4.953,-18.542
VBAT on Bottom Layer "Top layer-No Net" (solid, remove dead copper, pour order 45): 1.473,-13.005 1.473,-15.291 1.473,-15.316 1.27,-15.519 1.143,-15.646 -0.711,-15.646 -4.928,-15.646 -4.953,-15.672 -13.31,-8.179 -15.189,-5.029 -15.24,5.004 -6.909,13.411 2.794,13.411 4.623,14.884 8.026,14.884 13.462,9.347 16.018,11.121 13.487,14.63 7.341,18.263 2.794,19.533 -3.023,19.583 -9.881,17.297 -18.339,9.855 -19.812,-0.533 -18.542,-6.909 -14.681,-13.868 -8.941,-17.551 -4.293,-19.279 1.702,-19.736 5.105,-19.736 5.105,-13.005
PGND on Bottom Layer "Top layer-No Net" (solid, remove dead copper, pour order 22): -3.834,-12.471 0.584,-12.471 1.041,-12.014 1.905,-11.151 6.172,-11.151 6.198,-11.151 6.248,-11.151 6.248,-11.303 6.248,-12.09 6.248,-12.243 2.54,-12.243 1.321,-13.462 -1.956,-13.462 -2.083,-13.589 -2.083,-13.868 -3.838,-13.868
GND on Top Layer "Top layer-No Net" (solid, remove dead copper, pour order 54): -18.161,7.366 -18.161,5.053 -19.067,4.148 -19.431,3.783 -19.431,-1.194 -19.431,-7.696 -15.799,-11.328 -13.792,-9.322 -10.795,-9.322 -9.855,-9.322 -6.833,-12.344 -6.782,-12.395 -6.782,-15.113 -6.782,-17.983 -6.35,-18.415 -5.277,-19.488 0.696,-19.488 7.665,-19.488 10.871,-16.281 7.671,-13.081 7.671,-9.525 12.903,-9.525 13.614,-8.814 13.7,-8.729 17.437,-8.729 17.484,-8.729 19.533,-6.68 19.533,6.198 19.533,7.417 16.535,10.414 15.062,8.941 13.259,8.941 12.598,8.941 9.525,12.014 8.484,13.056 5.867,13.056 -2.819,13.056 -5.512,10.363 -9.982,10.363 -12.802,7.544 -13.005,7.341 -18.161,7.341
PGND on Top Layer "Top layer-No Net" (solid, remove dead copper, pour order 43): 4.343,-11.024 4.343,-12.192 4.42,-12.268 4.445,-12.294 5.69,-12.294 6.579,-12.294 7.493,-11.379 7.518,-11.354 7.518,-10.643 4.699,-10.643 4.343,-10.998
MT4 on Top Layer "Top layer-No Net" (solid, remove dead copper, pour order 41): 8.28,-9.677 8.28,-10.566 8.28,-11.125 9.271,-12.116 9.703,-12.548 9.703,-13.513 9.703,-13.691 11.379,-15.367 12.751,-13.995 12.751,-13.437 12.751,-13.386 10.897,-11.532 9.779,-10.414 9.779,-9.677
VBAT on Top Layer "Top layer-No Net" (solid, remove dead copper, pour order 23): -0.483,-10.439 -0.483,-12.167 0.635,-13.284 0.838,-13.487 0.838,-14.453 0.838,-14.854 0.895,-14.91 2.013,-14.91 2.032,-14.91 2.108,-14.834 2.108,-12.827 2.108,-12.802 1.397,-12.09 1.27,-11.963 1.27,-10.439
PGND on Top Layer "Top layer-No Net" (solid, remove dead copper, pour order 24): -0.914,-12.471 -0.914,-13.665 -0.762,-13.818 -0.762,-14.072 -0.762,-14.707 -0.025,-14.707 -0.025,-12.929 -0.483,-12.471
VBAT on Top Layer "Top layer-No Net" (solid, remove dead copper, pour order 25): -10.033,-11.938 -10.465,-12.37 -11.227,-12.37 -11.582,-12.37 -12.268,-13.056 -12.598,-13.386 -12.598,-13.843 -12.598,-13.919 -12.04,-14.478 -11.328,-15.189 -10.541,-15.189 -9.728,-14.376 -9.449,-14.097 -9.449,-12.522
MT1 on Top Layer "Top layer-No Net" (solid, remove dead copper, pour order 26): -13.442,-9.825 -14.945,-11.328 -14.935,-11.338 -14.935,-11.709 -14.935,-11.727 -13.843,-12.819 -13.733,-12.929 -13.411,-12.929 -13.208,-12.929 -12.421,-12.141 -11.735,-11.455 -11.481,-11.455 -11.405,-11.455 -11.074,-11.786 -10.851,-12.009 -10.833,-12.009 -10.267,-11.443 -10.008,-11.183 -10.008,-9.83
VBAT on Top Layer "Top layer-No Net" (solid, remove dead copper, pour order 27): -13.792,12.497 -14.834,11.455 -15.037,11.252 -15.037,10.541 -15.037,10.389 -14.529,9.881 -13.868,9.22 -13.31,9.22 -12.388,9.22 -10.978,10.63 -10.998,10.65 -10.998,10.871 -12.065,11.938 -13.005,12.878 -13.411,12.878
MT2 on Top Layer "Top layer-No Net" (solid, remove dead copper, pour order 28): -11.436,15.077 -11.466,15.077 -12.827,13.716 -12.827,13.513 -12.827,13.31 -12.319,12.802 -10.693,11.176 -10.262,11.176 -9.119,11.176 -8.687,11.608 -8.661,11.633 -8.661,12.929 -10.643,14.91 -10.897,15.164 -10.973,15.24 -11.278,15.24
VBAT on Top Layer "Top layer-No Net" (solid, remove dead copper, pour order 31): 13.281,13.256 12.217,12.192 12.192,12.167 12.192,11.811 12.192,11.532 12.344,11.379 12.497,11.227 12.497,10.897 12.497,10.744 12.04,10.287 12.421,9.906 12.522,9.906 14.376,9.906 15.518,11.048 15.545,11.074 15.545,11.176 15.545,11.43 13.513,13.462
MT3 on Top Layer "Top layer-No Net" (solid, remove dead copper, pour order 32): 8.738,15.189 8.738,14.249 8.738,13.259 9.474,12.522 10.287,11.709 11.125,11.709 12.344,12.929 12.954,13.538 12.954,14.021 12.852,14.021 11.684,15.189
PGND on Top Layer "Top layer-No Net" (solid, remove dead copper, pour order 33): -13.106,-7.112 -13.106,-8.103 -13.106,-8.318 -12.727,-8.698 -12.56,-8.865 -11.811,-8.865 -11.303,-8.865 -11.1,-8.661 -11.049,-8.611 -11.049,-6.883 -12.878,-6.883 -13.106,-7.112
PGND on Top Layer "Top layer-No Net" (solid, remove dead copper, pour order 34): -7.569,13.259 -7.925,12.903 -7.925,12.065 -7.925,11.913 -7.798,11.786 -6.629,11.786 -5.747,11.786 -5.569,11.963 -5.563,11.97 -5.563,13.259
PGND on Top Layer "Top layer-No Net" (solid, remove dead copper, pour order 35): 5.613,14.834 5.613,13.564 5.74,13.437 5.766,13.411 7.772,13.411 7.772,14.63 7.569,14.834
VBAT on Top Layer "Top layer-No Net" (solid, remove dead copper, pour order 36): 14.1,-9.401 12.167,-11.335 12.167,-11.684 12.167,-11.913 12.497,-12.243 13.284,-13.03 13.665,-13.03 13.767,-13.03 15.748,-11.049

## Keep-outs
Keep-Out Layer:
  circle w0.1: c0,11.8 r0.75
  circle w0.1: c5.288,-13.2 r0.65
  circle w0.1: c0,0 r19.5
  circle w0.1: c7.991,-13.207 r0.75
  circle w0.1: c-7.991,-13.207 r0.75
  circle w0.1: c-5.283,-13.208 r0.65

## Other copper
Top Layer:
  rectangle net PGND: -7.239,-11.836 -5.791,-10.16

## Silkscreen, mask and mechanical layers (free items; w line width, h text height)
Top Overlay:
  circle w0.001: c17.231,9.129 r0.001
  circle w0.001: c-17.231,-9.129 r0.001
  circle w0.1: c-8,-13.2 r1.4
  circle w0.1: c8,-13.2 r1.4
  lines w0.003: -1214.432,-797.841 -917.432,-797.841 ; -1,-1 1,-1 ; -0.09,0 0.09,0 ; 0,-0.09 0,0.09
  lines w0.05: -0.09,0 0.09,0 ; 0,-0.09 0,0.09
  lines w0.15: -15.011,-9.322 -14.275,-10.058 -14.275,-10.084 ; -10.16,14.453 -9.119,15.494 ; -7.214,4.547 -7.518,4.242 ; -7.163,3.886 -7.518,4.242 ; -5.639,2.362 -5.334,2.057 ; -5.004,2.362 -5.309,2.057 -5.334,2.057 ; 9.931,15.672 10.668,14.935 ; -7.518,4.242 -5.334,4.242 -5.334,2.057
  text "+" at -6.96,15.748 h1.2 r270
  text "+" at -13.056,9.652 h1.2 r270
  text "+" at 13.894,8.687 h1.2
  text "+" at -16.993,4.14 h1.2 r270
  text "Y" at -8.306,3.861 h0.8
  text "X" at -6.426,3.15 h0.8 r270
  text "+" at 17.399,-2.362 h1.2 r270
  text "20190801" at -8.712,-5.232 h1 r90
  text "P8-P-01 V01" at -10.135,-5.385 h1.2 r90
  text "+" at 15.697,-10.312 h1.2 r90
  text "-" at 9.957,-14.402 h1.2 r180
  text "+" at 2.388,-15.189 h1.2 r270
  text "+" at -9.703,-15.494 h1.2
Bottom Overlay:
  circle w0.1: c-15.1,0 r1.5
  lines w0.15: -3.785,-16.485 -1.93,-16.485 ; 2.489,-16.789 4.343,-16.789 ; 3.429,-17.882 3.429,-15.85 ; 14.605,4.191 15.697,4.191 ; 15.164,3.683 15.164,4.801
  text "VBAT" at 1.753,-12.192 h0.8